# Altium PCB NU1680 Rx_EVM_PCB_Ver.1.PcbDoc
Units mm, origin at the board's own origin, x right, y up, seen from the top; angles counter-clockwise.
Board outline 152.4 x 101.6 mm, 2 copper layers (Top Layer, Bottom Layer); 23 components, 15 nets, 67 pads, 43 vias.
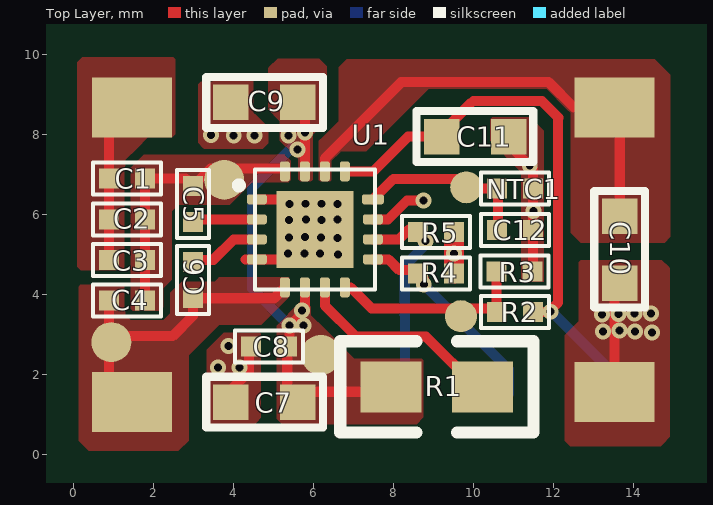
[diagram p0: Top Layer view]
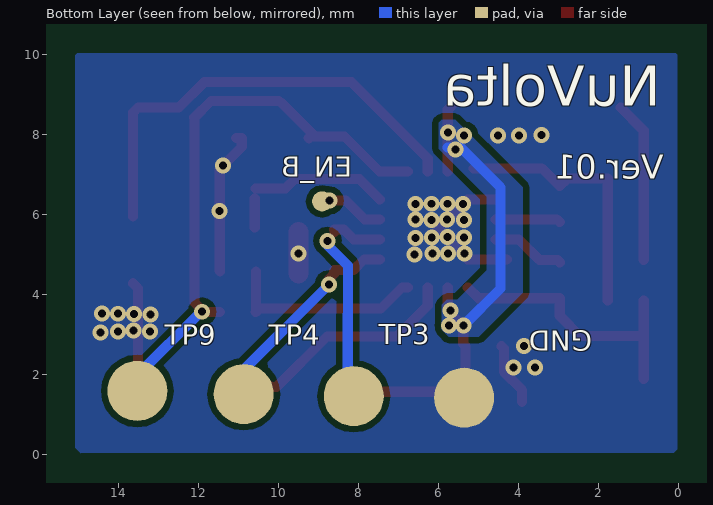
[diagram p1: Bottom Layer view, seen from below]

## Layer stack, top to bottom
Top Layer: signal copper 0.0356
Dielectric: dielectric 0.32, FR-4, Dk 4.8
Bottom Layer: signal copper 0.0356

## Board outline
-64.456,-29.287 87.944,-29.287 87.944,72.313 -64.456,72.313

## Design rules (kind name [scope] priority, off if disabled: settings)
Clearance [All] p1: gap=0.15
ComponentClearance [All] p1 off: gap=0.254 collisioncheckmode=3 verticalgap=0.254 showdistances=FALSE
PlaneConnect [All] p1: planeconnectstyle=Direct reliefexpansion=0.508 reliefentries=4 reliefconductorwidth=0.254 reliefairgap=0.254
PolygonConnect [All] p1: connectstyle=Direct reliefconductorwidth=0.254 reliefentries=4 polygonreliefangle="90 Angle"
RoutingVias [All] p1: holewidth=0.711 width=1.27 viastyle="Through Hole" minholewidth=0.711 minwidth=1.27 maxholewidth=0.711 maxwidth=1.27
SilkscreenOverComponentPads SilkToSolderMaskClearance [IsPad] p1: minsilkscreentomaskgap=0.254
SolderMaskExpansion [All] p1: expansion=0.102
TestPointUsage FabricationTestPointUsage [All] p1: valid=0 allowmultiple=FALSE
Testpoint FabricationTestpoint [All] p1: side=3 testpointundercomponent=TRUE minsize=1.016 maxsize=2.54 preferedsize=1.524 minholesize=0 maxholesize=1.016 preferedholesize=0.813 testpointgrid=0.025 style=297 order=0-112345678
Width [All] p1: maxlimit=3 minlimit=0.1 preferedwidth=0.254 minimp=50.000000 maximp=50.000000 favimp=50.000000
21 further rules are at their usual default settings.

## Components (designator, comment, footprint, x,y, rotation, side; value= is the part's Value field where it differs from the comment)
C1 "100nF/25V" SMD_R5_CAP_0402 1.33,6.908 r0 top
C2 "100nF/25V" SMD_R5_CAP_0402 1.33,5.892 r0 top
C3 "82nF/25V" SMD_R5_CAP_0402 1.33,4.876 r0 top
C4 "2.2nF/25V" SMD_R5_CAP_0402 1.33,3.86 r0 top
C5 "47nF/25V" SMD_R5_CAP_0402 2.981,6.273 r270 top
C6 "47nF/25V" SMD_R5_CAP_0402 2.981,4.368 r90 top
C7 "Comment" 0603 4.759,1.32 r180 top
C8 "100nF/25V" SMD_R5_CAP_0402 4.886,2.717 r180 top
C9 "Comment" 0603 4.759,8.813 r180 top
C10 "Comment" 0603 13.649,5.13 r270 top
C11 "Comment" 0603 10.04,7.96 r0 top
C12 "0.1uF" SMD_R5_CAP_0402 11.03,5.63 r180 top
GND "" SMD_R5_Testpoint_1.5mm 5.37,1.43 r180 bottom (schematic designator TP4)
NTC1 "100K" SMD_R5_RES_0402 11.03,6.66 r180 top
R1 "Comment" 0805 10.22,1.701 r180 top
R2 "10K" SMD_R5_RES_0402 11.03,3.57 r0 top
R3 "NC" SMD_R5_RES_0402 11.02,4.59 r0 top
R4 "NC" SMD_R5_RES_0402 9.06,4.54 r180 top
R5 "NC" SMD_R5_RES_0402 9.06,5.58 r180 top
TP3 "" SMD_R5_Testpoint_1.5mm 8.13,1.47 r180 bottom
TP4 "" SMD_R5_Testpoint_1.5mm 10.88,1.52 r180 bottom
TP9 "" SMD_R5_Testpoint_1.5mm 13.54,1.6 r180 bottom (schematic designator TP4)
U1 "NU1680" NU1680_QFN16 6.029,5.638 r0 top

## Footprints (in the part's own frame and the unit in brackets; to place one, negate y for a bottom-side part, rotate by r counter-clockwise, add the part's x,y. Pads: shape width x height; smd on the part's side, far side on the other; paste and mask are expansions set on the pad)
0603 [mil]
  rect 35x35 smd: 1(-33,0) 2(33,0)
  silkscreen extent -58,-25 57,25
0805 [mil]
  rect 60x50 smd: 1(0,0) 2(90,0)
  silkscreen extent -50,-45 140,45
NU1680_QFN16 [mm]
  rrect50% 0.5x0.25 smd mask+0.085: 1(-1.45,0.75) 2(-1.45,0.25) 3(-1.45,-0.25) 4(-1.45,-0.75) 9(1.45,-0.75) 10(1.45,-0.25) 11(1.45,0.25)
  rrect50% 0.25x0.5 smd mask+0.085: 5(-0.75,-1.45) 6(-0.25,-1.45) 7(0.25,-1.45) 8(0.75,-1.45) 13(0.75,1.45) 14(0.25,1.45) 15(-0.25,1.45) 16(-0.75,1.45)
  rrect50% 0.55x0.25 smd mask+0.085: 12(1.45,0.75)
  rect 1.92x1.92 smd mask+0.085: 17(0,0)
  silkscreen extent -1.97,-1.5 1.5,1.5
SMD_R5_CAP_0402 [mm]
  rect 0.5x0.5 smd mask+0.085: 1(-0.45,0) 2(0.45,0)
  silkscreen extent -0.85,-0.4 0.85,0.4
SMD_R5_RES_0402 [mm]
  rect 0.5x0.5 smd mask+0.085: 1(-0.45,0) 2(0.45,0)
  silkscreen extent -0.85,-0.4 0.85,0.4, body extent -0.5,-0.25 0.5,0.25, height 0.35
SMD_R5_Testpoint_1.5mm [mm]
  round 1.5 smd mask+0.085: 1(0,0)

## Part data
C1 C2 C3 C4 C5 C6 C8 C12: library part cap, "0402"
GND TP3 TP4 TP9: library part Testpoint
NTC1 R2 R3 R4 R5: library part Res1, "0402"

## Free pads (board coordinates)
  rect 2x1.5 smd: 1(1.457,8.686) 2(1.457,1.32) 4(13.522,8.686) 5(13.522,1.574)
  round 1 smd: 6(6.18,2.5) 7(3.76,6.88) 8(0.94,2.82)
  round 0.8 smd: 9(9.81,6.69) 10(9.68,3.47)
  round 0.5 smd far side: 12(8.92,6.34)

## Via types
v1: diameter 0.4, hole 0.2, Top Layer to Bottom Layer, 43 vias

## Nets (pads, with @x,y where several pads share a name; then routed paths per layer and width w, separated by ;. In a path a pad name is that pad's centre, name@x,y a point inside that pad or via, vN(x,y) a via of type N, cw(c..) or ccw(c..) an arc to the next point about the centre after c; other vN are vias at no path point)
AC1: C1.2 C2.2 C3.2 C4.2 C5.1 pad.7 U1.16 | length 6.7
  Top Layer w0.254: C4.2 C3.2 C2.2 C1.2 2.796,6.908 C5.1 3.42,7.162 5.14,7.162
AC2: C4.1 C6.1 pad.2 pad.8 U1.5 | length 7.1
  Top Layer w0.254: pad.2@0.88,1.897 pad.8@0.88,2.971 ; C4.1 pad.8@0.88,2.971 ; U1.5 5.009,3.918 C6.1 2.981,3.479 2.473,2.971 pad.8@0.88,2.971
EN_B: pad.12 U1.11 | length 1.5
  Top Layer w0.254: U1.11 7.858,5.888 8.33,6.36 v1(8.74,6.36)
GND: C7.2 C8.2 C9.2 C10.2 C11.2 C12.1 GND.1 NTC1.1 pad.5 R3.2 R4.1 R5.1 U1.1 U1.4 U1.17 | length 13
  Top Layer w0.254: C7.2 3.921,1.625 4.378,2.082 4.378,2.659 C8.2 ; 4.298,4.888 U1.4 5.279,4.888 U1.17 5.279,6.388 U1.1 ; R5.1@9.527,5.58 R5.1@9.527,5.638 ; C11.2@11.076,7.924 10.931,7.924 10.931,7.699 11.48,7.15 NTC1.1 C12.1 11.48,4.6 R3.2 ; pad.5 13.522,4.165 C10.2
  Top Layer w0.5: R4.1 R5.1
  other v1: 3.6,2.18 4.14,2.19 3.87,2.72 14.46,3.06 13.23,3.09 13.64,3.11 14.03,3.09 13.21,3.51 13.62,3.52 14.02,3.53 14.43,3.54 6.61,5.01 5.36,5.04 5.77,5.04 6.16,5.04 9.51,5.04 5.38,5.44 6.18,5.44 6.59,5.43 5.78,5.45 5.38,5.87 6.19,5.87 5.8,5.88 6.59,5.89 11.49,6.1 5.394,6.273 5.79,6.28 6.19,6.28 6.59,6.27 11.4,7.23 3.43,8 4,7.99 4.52,7.99
INT_B: pad.10 R2.1 R3.1 U1.8 | length 5.1
  Top Layer w0.254: U1.8 6.922,4.188 7.45,3.66 10.49,3.66 R2.1@10.57,3.58 ; R3.1 R2.1@10.57,3.58 ; R2.1 R2.1@10.57,3.58
NetC1_1: C1.1 C2.1 C3.1 pad.1 | length 4
  Top Layer w0.254: C3.1 C2.1 C1.1 0.88,8.109 pad.1
NetC5_2: C5.2 U1.2 | length 1.6
  Top Layer w0.254: C5.2 3.046,5.888 U1.2
NetC6_2: C6.2 U1.3 | length 1.8
  Top Layer w0.254: C6.2 3.039,4.876 3.489,4.876 4.001,5.388 U1.3
NetR1_1: R1.1 U1.7 | length 5.3
  Top Layer w0.254: U1.7 6.279,3.737 7.056,2.96 8.8,2.96 10.059,1.701 R1.1 R1.1@10.22,1.72
OUT: C10.1 pad.4 U1.14 | length 11.4
  Top Layer w0.254: U1.14 6.279,7.412 8.188,9.321 11.871,9.321 12.506,8.686 pad.4 13.649,8.559 C10.1
SCL: R5.2 TP3.1 U1.10 | length 5.5
  Top Layer w0.254: U1.10 8.128,5.388 8.378,5.638 8.627,5.638 8.61,5.621 R5.2
  Bottom Layer w0.254: TP3.1 8.28,1.62 8.28,3.51 8.273,3.517 8.273,4.733 8.79,5.25 v1(8.79,5.35)
SDA: R4.2 TP4.1 U1.9 | length 5.2
  Top Layer w0.254: U1.9 7.872,4.888 8.14,4.62 8.142,4.622 R4.2@8.627,4.622 ; R4.2 8.75,4.4 v1(8.75,4.26)
  Bottom Layer w0.254: v1(8.75,4.26) 10.88,2.13 TP4.1
TEMP/VBAT: C12.2 NTC1.2 pad.9 U1.12 | length 4.2
  Top Layer w0.254: U1.12 7.991,6.9 9.6,6.9 pad.9 ; pad.9@9.76,6.74 pad.9 ; NTC1.2 9.84,6.66 pad.9 ; C12.2@10.606,5.688 NTC1.2@10.606,6.41
V5V: C11.1 R2.2 TP9.1 U1.13 | length 14.1
  Top Layer w0.254: U1.13 6.808,7.088 7.488,7.088 8.36,7.96 C11.1 ; C11.1@9.142,8.012 9.91,8.78 ; C11.1@9.246,7.915 C11.1@9.255,7.924 ; 10,8.85 11.7,8.85 12.12,8.43 ; R2.2 11.87,3.57 12.11,3.81 12.11,8.36
  Bottom Layer w0.254: v1(11.92,3.58) 11.95,3.58 13.54,1.99 TP9.1
VRECT: C7.1 C8.1 C9.1 pad.6 R1.2 U1.6 U1.15 | length 13
  Top Layer w0.254: C9.1 5.779,8.631 5.779,8.14 5.779,7.69 U1.15 ; U1.6 5.779,3.61 5.394,3.225 5.394,2.775 C8.1 5.336,1.581 C7.1 5.858,1.581 7.814,1.581 R1.2
  Bottom Layer w0.254: v1(5.39,3.23) 4.46,4.16 4.46,6.69 5.46,7.69 v1@5.779,7.69
  other v1: 5.75,3.24 5.71,3.61 5.59,7.64 5.37,7.99 5.779,8.06

## Polygon pours and split planes (outlines as drawn)
GND on Top Layer "Top Layer-No Net" (solid, remove dead copper, pour order 1010): 10.41,8.36 10.41,7.85 11.14,7.12 11.19,7.07 11.19,5.89 11.19,4.34 11.21,4.32 11.22,4.33 11.75,4.33 11.75,8.11 11.44,8.42 11.42,8.44 10.85,8.44 10.46,8.44 10.44,8.42 10.41,8.39 10.41,8.36
OUT on Top Layer "Top Layer-No Net" (solid, remove dead copper, pour order 1009): 6.21,6.84 6.41,6.84 6.44,6.87 6.44,7.25 6.44,7.35 6.66,7.57 6.68,7.59 7.14,7.59 7.31,7.59 8.6,8.88 8.87,9.15 11.39,9.15 11.82,9.15 12.33,8.64 12.42,8.55 12.42,8.16 12.42,5.56 12.63,5.35 12.67,5.31 13.01,5.31 14.77,5.31 14.91,5.45 14.91,5.74 14.91,9.51 14.54,9.88 14.53,9.89 14.1,9.89 6.82,9.89 6.62,9.69 6.62,9.48 6.62,8.34 6.24,7.96 6.13,7.85 6.13,7.35 6.13,6.87 6.16,6.84 6.21,6.84
AC2 on Top Layer "Top Layer-No Net" (solid, remove dead copper, pour order 1008): 2.65,4.28 2.69,4.32 2.7,4.33 2.85,4.33 3.52,4.33 3.61,4.42 3.63,4.44 5.23,4.44 5.37,4.44 5.4,4.41 5.4,4.35 5.4,4.21 4.95,3.76 4.73,3.54 2.76,3.54 2.76,3.8 2.47,4.09 2.65,4.27 2.65,4.28
VRECT on Top Layer "Top Layer-No Net" (solid, remove dead copper, pour order 1007): 5.64,3.8 5.07,3.23 5.07,2.79 5.07,0.91 5.15,0.83 5.21,0.77 6.72,0.77 8.57,0.77 8.74,0.94 8.74,1.37 8.74,2.37 8.7,2.41 7.6,2.41 7.01,2.41 6.27,3.15 5.93,3.49 5.93,3.69 5.93,3.71 5.83,3.81 5.8,3.84 5.68,3.84 5.64,3.8
GND on Top Layer "Top Layer-No Net" (solid, remove dead copper, pour order 1006): 12.68,4.87 14.7,4.87 14.87,4.7 14.9,4.67 14.9,4.46 14.9,0.45 14.72,0.27 14.67,0.22 13.87,0.22 12.41,0.22 12.29,0.34 12.28,0.35 12.28,1.48 12.28,2.99 12.63,3.34 12.63,4.57 12.63,4.82 12.68,4.87
VRECT on Top Layer "Top Layer-No Net" (solid, remove dead copper, pour order 1005): 5.94,6.85 5.95,6.85 5.98,6.88 5.98,7.44 5.98,8 6.25,8.27 6.33,8.35 6.33,9.27 6.33,9.72 6.14,9.91 5.83,9.91 5.1,9.91 4.89,9.7 4.86,9.67 4.86,9.15 4.86,8.75 5.02,8.59 4.86,8.75 4.86,8.64 5.14,8.36 5.15,8.35 5.15,7.87 5.15,7.86 5.47,7.54 5.61,7.4 5.61,6.9 5.61,6.89 5.66,6.84 5.73,6.84 5.93,6.84 5.94,6.85
AC1 on Top Layer "Top Layer-No Net" (solid, remove dead copper, pour order 1004): 1.53,3.61 2.03,3.61 2.15,3.61 2.16,3.61 2.24,3.69 2.24,3.89 2.24,4.17 2.43,4.36 2.45,4.38 2.45,4.77 2.45,6.09 2.63,6.27 2.64,6.26 3.13,6.26 3.9,6.26 4.27,6.63 4.46,6.82 5.24,6.82 5.37,6.82 5.39,6.84 5.42,6.87 5.42,6.91 5.42,7.35 5.29,7.48 5.27,7.5 4.31,7.5 1.75,7.5 1.43,7.18 1.43,6.95 1.43,3.65 1.47,3.61 1.53,3.61
AC2 on Top Layer "Top Layer-No Net" (solid, remove dead copper, pour order 1003): 0.16,4.25 0.62,4.25 1.23,4.25 1.27,4.21 1.29,4.19 1.29,4.02 1.29,3.5 1.42,3.37 1.6,3.37 2.24,3.37 2.33,3.46 2.41,3.54 2.41,3.93 2.41,4.05 2.56,4.2 2.57,4.2 2.62,4.25 2.65,4.28 2.92,4.28 5.33,4.28 5.39,4.22 5.39,3.99 5.39,3.96 5.06,3.63 4.69,3.26 3.98,3.26 3.64,3.26 3.17,2.79 2.87,2.49 2.87,0.93 2.87,0.36 2.61,0.1 2.6,0.11 2.13,0.11 0.37,0.11 0.13,0.35 0.12,0.36 0.12,0.98 0.12,4.21 0.16,4.25
NetC1_1 on Top Layer "Top Layer-No Net" (solid, remove dead copper, pour order 1002): 0.63,4.62 1.22,4.62 1.28,4.68 1.29,4.69 1.29,4.84 1.29,7.38 1.57,7.66 1.85,7.94 2.35,7.94 2.46,7.94 2.47,7.95 2.54,8.02 2.54,9.07 2.54,9.89 2.49,9.94 1.64,9.94 0.21,9.94 0.09,9.82 0.09,9.64 0.09,4.7 0.17,4.62 0.63,4.62
GND on Top Layer "Top Layer-No Net" (solid, remove dead copper, pour order 1001): 4.65,3.06 3.75,3.06 3.51,2.82 3.32,2.63 3.32,1.44 3.32,0.82 3.4,0.74 3.43,0.77 4.39,0.77 4.52,0.77 4.57,0.82 4.68,0.93 4.68,2.96 4.68,3.03 4.65,3.06
GND on Top Layer "Top Layer-No Net" (solid, remove dead copper, pour order 1000): 3.51,9.33 3.17,9.33 3.11,9.27 3.11,8.05 3.11,7.8 3.24,7.67 3.26,7.65 4.27,7.65 4.72,7.65 4.85,7.78 4.86,7.79 4.86,8.13 4.86,8.19 4.55,8.5 4.49,8.56 4.49,9.05 4.49,9.42 4.47,9.44 4.45,9.42 3.58,9.42 3.26,9.42 3.18,9.34
GND on Bottom Layer "Top Layer-No Net" (solid, remove dead copper, pour order 1012): 0.07,10.03 0.08,10.04 1.62,10.04 15.04,10.04 15.09,9.99 15.09,9.73 15.09,0.18 14.95,0.04 14.94,0.05 14.7,0.05 0.13,0.05 0.05,0.13 0.04,0.14 0.04,0.52 0.04,10 0.07,10.03
VRECT on Bottom Layer "Top Layer-No Net" (solid, remove dead copper, pour order 1011): 5.6,8.38 5.59,8.38 4.65,7.44 3.9,6.69 3.9,4.68 3.9,4.06 5,2.96 5.01,2.95 5.41,2.95 5.75,2.95 5.89,3.09 5.93,3.13 5.93,3.63 5.93,3.75 5.83,3.85 5.8,3.88 5.63,3.88 5.54,3.88 4.82,4.6 4.81,4.61 4.81,5.51 4.81,6.46 5.15,6.8 6.01,7.66 6.01,8.3 5.93,8.38 5.6,8.38

## Silkscreen, mask and mechanical layers (free items; w line width, h text height)
Bottom Overlay:
  text "NuVolta" at 0.45,8.73 h1
  text "EN_B" at 8.17,6.95 h0.5
  text "Ver.01" at 0.38,6.9 h0.6
Mechanical 1:
  lines w0.2: 0.06,0.05 15.06,0.05 15.06,10.05 0.06,10.05 0.06,0.05

## Dimensions
15.06,0.05 to 15.06,10.05 on Top Overlay
0,-0.11 to 15.06,0.05 on Top Overlay